# Altium PCB nrf24l01_cell(P40).PcbDoc (part 6 of 11)
Units mm, origin at the board's own origin, x right, y up, seen from the top; angles counter-clockwise.
Board outline 136.2 x 112.2 mm, 2 copper layers (TopLayer, BottomLayer); 520 components, 0 nets, 2804 pads, 1040 vias.
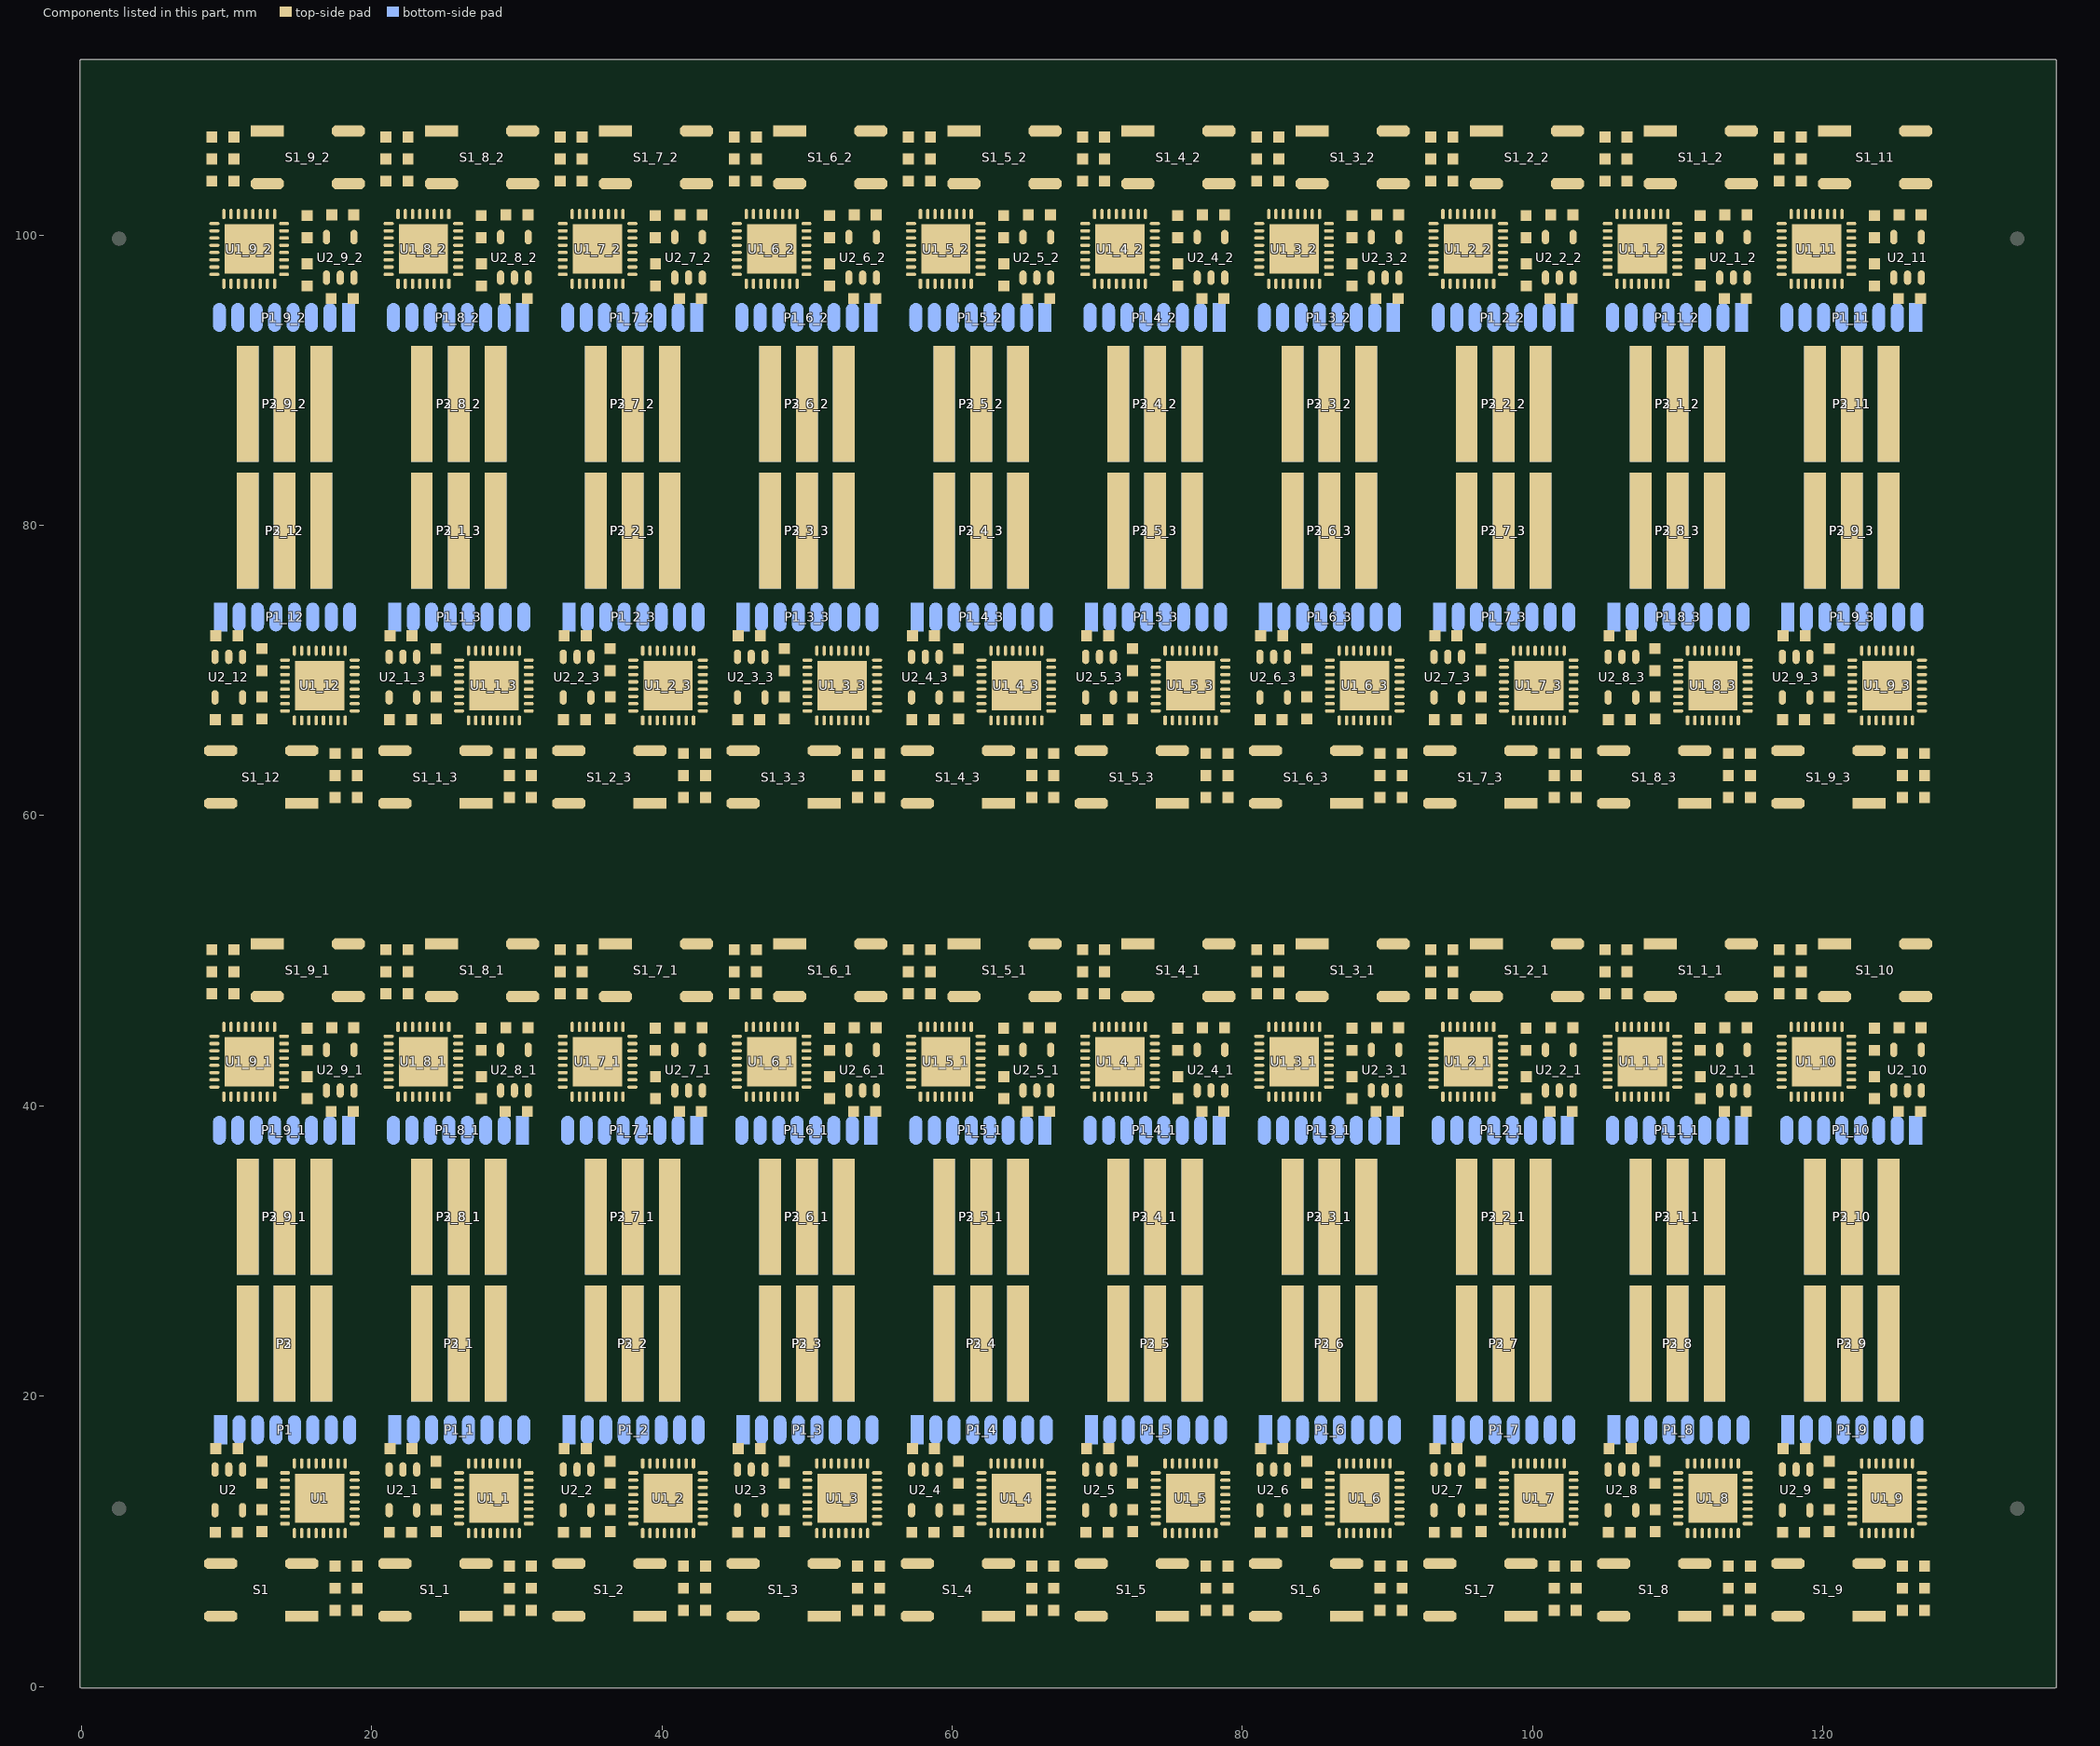
[diagram p6: the components of this part, seen from the top]

## Via types
v1: diameter 0.4, hole 0.2, TopLayer to BottomLayer, tented both sides, 1040 vias

## Nets (pads, with @x,y where several pads share a name; then routed paths per layer and width w, separated by ;. In a path a pad name is that pad's centre, name@x,y a point inside that pad or via, vN(x,y) a via of type N, cw(c..) or ccw(c..) an arc to the next point about the centre after c; other vN are vias at no path point) (continued)
copper on no net: (continued)
  TopLayer w0.203: 108.256,12.381 ccw(c107.81,12.84) 108.45,12.84 ; 108.256,68.381 ccw(c107.81,68.84) 108.45,68.84 ; 108.44,15.41 109.2,16.17 110.786,16.17 111.18,15.776 111.18,15.36 ; 108.44,15.789 ccw(c108.44,16.705) 109.088,16.058 ; 108.44,71.41 109.2,72.17 110.786,72.17 111.18,71.776 111.18,71.36 ; 108.44,71.789 ccw(c108.44,72.705) 109.088,72.058 ; 108.45,12.18 108.45,12.84 ; 108.45,68.18 108.45,68.84 ; 108.644,12.381 cw(c109.09,12.84) 108.45,12.84 ; 108.644,68.381 cw(c109.09,68.84) 108.45,68.84 ; 108.719,15.51 cw(c109.152,15.51) 108.846,15.816 ; 108.719,71.51 cw(c109.152,71.51) 108.846,71.816 ; v1(108.79,19.37) 108.835,19.325 111.04,19.325 111.512,18.854 112.48,18.854 114.83,16.503 114.83,14.71 ; v1(108.79,75.37) 108.835,75.325 111.04,75.325 111.512,74.854 112.48,74.854 114.83,72.503 114.83,70.71 ; 108.82,40.64 108.82,40.224 109.214,39.83 110.8,39.83 111.56,40.59 ; 108.82,96.64 108.82,96.224 109.214,95.83 110.8,95.83 111.56,96.59 ; 108.833,40.405 ccw(c109.302,40.405) 108.971,40.073 ; 108.833,96.405 ccw(c109.302,96.405) 108.971,96.073 ; v1@108.86,19.44 ccw(c109.136,19.716) 109.136,19.325 ; v1@108.86,75.44 ccw(c109.136,75.716) 109.136,75.325 ; v1@109.18,14.01 ccw(c109.012,14.178) 109.25,14.178 ccw(c109.488,14.178) v1@109.32,14.01 ; v1@109.18,70.01 ccw(c109.012,70.178) 109.25,70.178 ccw(c109.488,70.178) v1@109.32,70.01 ; v1@109.195,12.564 cw(c109.545,12.219) 109.545,12.71 ; v1@109.195,68.564 cw(c109.545,68.219) 109.545,68.71 ; v1@109.2,12.42 cw(c109.057,12.277) 109.26,12.277 ; v1@109.2,68.42 cw(c109.057,68.277) 109.26,68.277 ; v1@109.24,38.41 ccw(c109.072,38.242) 109.072,38.48 ccw(c109.072,38.718) v1@109.24,38.55 ; v1@109.24,94.41 ccw(c109.072,94.242) 109.072,94.48 ccw(c109.072,94.718) v1@109.24,94.55 ; v1(109.25,13.94) 109.25,14.55 109.41,14.71 110.03,14.71 ; v1(109.25,69.94) 109.25,70.55 109.41,70.71 110.03,70.71 ; 109.26,12.228 cw(c109.532,12.228) v1@109.34,12.42 ; v1@109.26,12.49 109.26,11.59 109.11,11.44 107.11,11.44 ; v1@109.26,12.53 109.44,12.71 110.03,12.71 ccw(c110.03,11.742) v1@109.34,12.421 ; 109.26,68.228 cw(c109.532,68.228) v1@109.34,68.42 ; v1@109.26,68.49 109.26,67.59 109.11,67.44 107.11,67.44 ; v1@109.26,68.53 109.44,68.71 110.03,68.71 ccw(c110.03,67.742) v1@109.34,68.421 ; v1@109.366,12.512 cw(c109.545,12.555) 109.415,12.685 ; v1@109.366,68.512 cw(c109.545,68.555) 109.415,68.685 ; v1(109.43,17.94) 109.92,17.94 110.005,18.025 112.159,18.025 113.68,16.504 113.68,15.36 ; v1(109.43,73.94) 109.92,73.94 110.005,74.025 112.159,74.025 113.68,72.504 113.68,71.36 ; v1@109.5,17.87 cw(c109.668,17.702) 109.668,17.94 cw(c109.668,18.178) v1@109.5,18.01 ; v1@109.5,73.87 cw(c109.668,73.702) 109.668,73.94 cw(c109.668,74.178) v1@109.5,74.01 ; v1@109.9,45.21 cw(c109.732,45.042) 109.97,45.042 cw(c110.208,45.042) v1@110.04,45.21 ; v1@109.9,101.21 cw(c109.732,101.042) 109.97,101.042 cw(c110.208,101.042) v1@110.04,101.21 ; v1@109.96,10.79 ccw(c109.792,10.958) 110.03,10.958 ccw(c110.268,10.958) v1@110.1,10.79 ; v1@109.96,66.79 ccw(c109.792,66.958) 110.03,66.958 ccw(c110.268,66.958) v1@110.1,66.79 ; 109.97,41.29 110.59,41.29 110.75,41.45 v1(110.75,42.06) ; 109.97,42.79 111.18,42.79 111.55,43.16 ; 109.97,44.79 v1(109.97,45.28) ; 109.97,97.29 110.59,97.29 110.75,97.45 v1(110.75,98.06) ; 109.97,98.79 111.18,98.79 111.55,99.16 ; 109.97,100.79 v1(109.97,101.28) ; 110,23.63 110,20.94 111.68,19.26 112.648,19.26 115.52,16.388 115.52,14.42 115.31,14.21 114.83,14.21 ; 110,79.63 110,76.94 111.68,75.26 112.648,75.26 115.52,72.388 115.52,70.42 115.31,70.21 114.83,70.21 ; v1(110.03,10.72) 110.03,11.21 ; 110.03,13.21 108.82,13.21 108.45,12.84 ; v1(110.03,66.72) 110.03,67.21 ; 110.03,69.21 108.82,69.21 108.45,68.84 ; 110.455,43.29 ccw(c110.455,43.781) v1@110.805,43.436 ; 110.455,99.29 ccw(c110.455,99.781) v1@110.805,99.436 ; v1@110.5,37.99 ccw(c110.332,37.822) 110.332,38.06 ccw(c110.332,38.298) v1@110.5,38.13 ; v1@110.5,93.99 ccw(c110.332,93.822) 110.332,94.06 ccw(c110.332,94.298) v1@110.5,94.13 ; 110.585,43.315 ccw(c110.455,43.445) v1@110.634,43.488 ; 110.585,99.315 ccw(c110.455,99.445) v1@110.634,99.488 ; v1@110.66,99.579 cw(c109.97,100.258) 109.97,99.29 110.56,99.29 v1@110.74,99.47 ; v1@110.66,99.58 ccw(c110.468,99.772) 110.74,99.772 ; v1@110.68,41.99 cw(c110.512,41.822) 110.75,41.822 cw(c110.988,41.822) v1@110.82,41.99 ; v1@110.68,97.99 cw(c110.512,97.822) 110.75,97.822 cw(c110.988,97.822) v1@110.82,97.99 ; v1(110.69,17.52) 111.16,17.52 111.665,17.015 112.68,16 112.68,15.36 ; v1(110.69,73.52) 111.16,73.52 111.665,73.015 112.68,72 112.68,71.36 ; v1@110.74,43.47 110.56,43.29 109.97,43.29 ccw(c109.97,44.258) 110.66,43.579 ccw(c110.468,43.772) 110.74,43.772 ; v1@110.74,43.51 110.74,44.41 110.89,44.56 112.89,44.56 ; 110.74,43.723 ccw(c110.943,43.723) v1@110.8,43.58 ; v1@110.74,99.51 110.74,100.41 110.89,100.56 112.89,100.56 ; 110.74,99.723 ccw(c110.943,99.723) v1@110.8,99.58 ; v1@110.76,17.45 cw(c110.928,17.282) 110.928,17.52 cw(c110.928,17.758) v1@110.76,17.59 ; v1@110.76,73.45 cw(c110.928,73.282) 110.928,73.52 cw(c110.928,73.758) v1@110.76,73.59 ; 110.864,36.675 cw(c110.864,36.284) v1@111.14,36.56 ; 110.864,92.675 cw(c110.864,92.284) v1@111.14,92.56 ; 110.912,39.942 cw(c111.56,39.295) 111.56,40.211 ; 110.912,95.942 cw(c111.56,95.295) 111.56,96.211 ; 111.029,15.927 cw(c110.698,15.595) 111.167,15.595 ; 111.029,71.927 cw(c110.698,71.595) 111.167,71.595 ; 111.154,40.184 ccw(c110.847,40.49) 111.281,40.49 ; 111.154,96.184 ccw(c110.847,96.49) 111.281,96.49 ; 111.356,43.619 cw(c110.91,43.16) 111.55,43.16 ; 111.356,99.619 cw(c110.91,99.16) 111.55,99.16 ; 111.379,8.28 113.486,8.28 ; 111.379,64.28 113.486,64.28 ; 111.55,43.82 111.55,43.16 ; 111.55,99.82 111.55,99.16 ; 111.744,43.619 ccw(c112.19,43.16) 111.55,43.16 ; 111.744,99.619 ccw(c112.19,99.16) 111.55,99.16 ; v1@111.81,37.29 ccw(c111.642,37.122) 111.642,37.36 ccw(c111.642,37.598) v1@111.81,37.43 ; v1@111.81,93.29 ccw(c111.642,93.122) 111.642,93.36 ccw(c111.642,93.598) v1@111.81,93.43 ; v1(111.88,37.36) v1@111.81,37.36 ; v1(111.88,93.36) v1@111.81,93.36 ; v1@111.89,37.28 v1@111.81,37.36 ; v1@111.89,93.28 v1@111.81,93.36 ; v1@111.95,17.422 cw(c111.95,17.184) 112.118,17.352 cw(c112.286,17.52) v1@112.048,17.52 ; v1(111.95,17.52) 113.18,16.29 113.18,15.36 ; v1@111.95,73.422 cw(c111.95,73.184) 112.118,73.352 cw(c112.286,73.52) v1@112.048,73.52 ; v1(111.95,73.52) 113.18,72.29 113.18,71.36 ; 112.006,8.523 ccw(c112.593,9.111) 112.593,8.28 ; 112.006,64.523 ccw(c112.593,65.111) 112.593,64.28 ; 112.15,8.667 ccw(c113.084,9.602) 113.084,8.28 ; 112.15,64.667 ccw(c113.084,65.602) 113.084,64.28 ; 112.54,19.732 cw(c112.54,18.673) 113.288,19.422 ; 112.54,20.17 114.79,17.92 v1(115.45,17.92) ; 112.54,35.3 v1(115.31,38.07) ; 112.54,35.862 ccw(c112.54,37.219) 113.499,36.259 ; 112.54,36.065 ccw(c112.54,37.913) 113.846,36.606 ; 112.54,36.268 ccw(c112.54,38.606) 114.193,36.953 ; v1(112.54,36.86) 113.344,36.86 113.422,36.938 114.734,38.25 114.734,39.62 114.734,41.004 114.79,41.06 114.79,41.84 114.6,42.03 113.06,42.03 112.89,41.86 112.89,41.06 ; 112.54,75.732 cw(c112.54,74.673) 113.288,75.422 ; 112.54,76.17 114.79,73.92 v1(115.45,73.92) ; 112.54,91.3 v1(115.31,94.07) ; 112.54,91.862 ccw(c112.54,93.219) 113.499,92.259 ; 112.54,92.065 ccw(c112.54,93.913) 113.846,92.606 ; 112.54,92.268 ccw(c112.54,94.606) 114.193,92.953 ; v1(112.54,92.86) 113.344,92.86 113.422,92.938 114.734,94.25 114.734,95.62 114.734,97.004 114.79,97.06 114.79,97.84 114.6,98.03 113.06,98.03 112.89,97.86 112.89,97.06 ; v1@112.61,36.79 cw(c112.778,36.622) 112.778,36.86 cw(c112.778,37.098) v1@112.61,36.93 ; v1@112.61,92.79 cw(c112.778,92.622) 112.778,92.86 cw(c112.778,93.098) v1@112.61,92.93 ; 112.782,20.38 ccw(c113.873,20.38) 113.102,19.608 ; 112.782,76.38 ccw(c113.873,76.38) 113.102,75.608 ; 112.785,41.415 ccw(c112.532,41.668) 112.89,41.668 ccw(c113.248,41.668) 112.995,41.415 ; 112.785,44.215 ccw(c112.532,44.468) 112.89,44.468 ccw(c113.248,44.468) 112.995,44.215 ; 112.785,97.415 ccw(c112.532,97.668) 112.89,97.668 ccw(c113.248,97.668) 112.995,97.415 ; 112.785,100.215 ccw(c112.532,100.468) 112.89,100.468 ccw(c113.248,100.468) 112.995,100.215 ; 112.89,43.86 112.89,44.56 ; 112.89,44.484 cw(c113.557,44.484) 113.341,45.116 ; 112.89,44.769 cw(c113.46,44.769) 113.275,45.308 ; 112.89,45.054 cw(c113.362,45.054) 113.209,45.5 ; 112.89,99.86 112.89,100.56 ; 112.89,100.484 cw(c113.557,100.484) 113.341,101.116 ; 112.89,100.769 cw(c113.46,100.769) 113.275,101.308 ; 112.89,101.054 cw(c113.362,101.054) 113.209,101.5 ; 112.985,20.38 ccw(c114.567,20.38) 113.448,19.262 ; 112.985,76.38 ccw(c114.567,76.38) 113.448,75.262 ; v1@113.042,37.37 ccw(c112.804,37.37) 112.972,37.538 ccw(c113.14,37.706) v1@113.14,37.468 ; v1@113.042,93.37 ccw(c112.804,93.37) 112.972,93.538 ccw(c113.14,93.706) v1@113.14,93.468 ; 113.188,20.38 ccw(c115.261,20.38) 113.795,18.915 ; 113.188,35.62 cw(c113.981,35.62) 113.421,36.181 ; 113.188,76.38 ccw(c115.261,76.38) 113.795,74.915 ; 113.188,91.62 cw(c113.981,91.62) 113.421,92.181 ; 113.25,45.38 112.89,45.02 112.89,44.56 ; 113.25,101.38 112.89,101.02 112.89,100.56 ; 113.288,8.082 ccw(c112.811,7.605) 112.811,8.28 ccw(c112.811,8.955) 113.288,8.478 ; 113.288,64.082 ccw(c112.811,63.605) 112.811,64.28 ccw(c112.811,64.955) 113.288,64.478 ; 113.49,6.76 114.21,7.48 114.21,9.16 113.68,9.69 113.68,10.56 ; 113.49,7.039 ccw(c113.49,7.714) 113.967,7.237 ccw(c114.444,6.76) 113.769,6.76 ; 113.49,62.76 114.21,63.48 114.21,65.16 113.68,65.69 113.68,66.56 ; 113.49,63.039 ccw(c113.49,63.714) 113.967,63.237 ccw(c114.444,62.76) 113.769,62.76 ; 114.18,15.36 114.18,16.579 112.311,18.447 108.91,18.447 108.717,18.64 v1@108.19,18.64 ; 114.18,71.36 114.18,72.579 112.311,74.447 108.91,74.447 108.717,74.64 v1@108.19,74.64 ; 114.536,39.422 cw(c114.059,38.945) 114.734,38.945 cw(c115.409,38.945) 114.932,39.422 ; 114.536,39.818 ccw(c114.059,40.295) 114.734,40.295 ccw(c115.409,40.295) 114.932,39.818 ; 114.536,95.422 cw(c114.059,94.945) 114.734,94.945 cw(c115.409,94.945) 114.932,95.422 ; 114.536,95.818 ccw(c114.059,96.295) 114.734,96.295 ccw(c115.409,96.295) 114.932,95.818 ; 114.685,41.415 ccw(c114.432,41.668) 114.79,41.668 ccw(c115.148,41.668) 114.895,41.415 ; 114.685,97.415 ccw(c114.432,97.668) 114.79,97.668 ccw(c115.148,97.668) 114.895,97.415 ; 114.734,40.317 cw(c115.283,40.317) 114.895,40.705 ; 114.734,96.317 cw(c115.283,96.317) 114.895,96.705 ; 114.812,8.478 ccw(c114.335,8.955) 115.01,8.955 ccw(c115.685,8.955) 115.208,8.478 ; 114.812,64.478 ccw(c114.335,64.955) 115.01,64.955 ccw(c115.685,64.955) 115.208,64.478 ; 114.83,11.21 114.83,10.52 115.01,10.34 115.01,8.28 ; 114.83,12.21 v1(115.45,12.21) v1@115.52,12.21 ; 114.83,67.21 114.83,66.52 115.01,66.34 115.01,64.28 ; 114.83,68.21 v1(115.45,68.21) v1@115.52,68.21 ; v1@114.92,9.72 cw(c114.704,9.504) 115.01,9.504 ; v1@114.92,9.86 ccw(c114.704,10.076) 115.01,10.076 ; v1@114.92,65.72 cw(c114.704,65.504) 115.01,65.504 ; v1@114.92,65.86 ccw(c114.704,66.076) 115.01,66.076 ; v1@115.212,38.07 cw(c114.974,38.07) 115.142,37.902 cw(c115.31,37.734) v1@115.31,37.972 ; v1@115.212,94.07 cw(c114.974,94.07) 115.142,93.902 cw(c115.31,93.734) v1@115.31,93.972 ; v1@115.38,12.14 ccw(c115.212,11.972) 115.212,12.21 ccw(c115.212,12.448) v1@115.38,12.28 ; v1@115.38,17.85 ccw(c115.212,17.682) 115.212,17.92 ccw(c115.212,18.158) v1@115.38,17.99 ; v1@115.38,68.14 ccw(c115.212,67.972) 115.212,68.21 ccw(c115.212,68.448) v1@115.38,68.28 ; v1@115.38,73.85 ccw(c115.212,73.682) 115.212,73.92 ccw(c115.212,74.158) v1@115.38,73.99 ; v1@116.48,43.79 v1(116.55,43.79) 117.17,43.79 ; v1@116.48,99.79 v1(116.55,99.79) 117.17,99.79 ; v1(116.55,38.08) 117.21,38.08 119.46,35.83 ; v1(116.55,94.08) 117.21,94.08 119.46,91.83 ; v1@116.62,38.01 cw(c116.788,37.842) 116.788,38.08 cw(c116.788,38.318) v1@116.62,38.15 ; v1@116.62,43.72 cw(c116.788,43.552) 116.788,43.79 cw(c116.788,44.028) v1@116.62,43.86 ; v1@116.62,94.01 cw(c116.788,93.842) 116.788,94.08 cw(c116.788,94.318) v1@116.62,94.15 ; v1@116.62,99.72 cw(c116.788,99.552) 116.788,99.79 cw(c116.788,100.028) v1@116.62,99.86 ; v1(116.69,17.93) 119.46,20.7 ; v1@116.69,18.028 ccw(c116.69,18.266) 116.858,18.098 ccw(c117.026,17.93) v1@116.788,17.93 ; v1(116.69,73.93) 119.46,76.7 ; v1@116.69,74.028 ccw(c116.69,74.266) 116.858,74.098 ccw(c117.026,73.93) v1@116.788,73.93 ; 116.792,47.522 cw(c116.315,47.045) 116.99,47.045 cw(c117.665,47.045) 117.188,47.522 ; 116.792,103.522 cw(c116.315,103.045) 116.99,103.045 cw(c117.665,103.045) 117.188,103.522 ; 116.99,45.924 cw(c117.296,45.924) v1@117.08,46.14 ; 116.99,46.496 ccw(c117.296,46.496) v1@117.08,46.28 ; 116.99,47.72 116.99,45.66 117.17,45.48 117.17,44.79 ; 116.99,101.924 cw(c117.296,101.924) v1@117.08,102.14 ; 116.99,102.496 ccw(c117.296,102.496) v1@117.08,102.28 ; 116.99,103.72 116.99,101.66 117.17,101.48 117.17,100.79 ; 117.068,16.182 cw(c116.591,15.705) 117.266,15.705 cw(c117.941,15.705) 117.464,16.182 ; 117.068,16.578 ccw(c116.591,17.055) 117.266,17.055 ccw(c117.941,17.055) 117.464,16.578 ; 117.068,72.182 cw(c116.591,71.705) 117.266,71.705 cw(c117.941,71.705) 117.464,72.182 ; 117.068,72.578 ccw(c116.591,73.055) 117.266,73.055 ccw(c117.941,73.055) 117.464,72.578 ; 117.105,14.585 cw(c116.852,14.332) 117.21,14.332 cw(c117.568,14.332) 117.315,14.585 ; 117.105,15.295 ccw(c116.717,15.683) 117.266,15.683 ; 117.105,70.585 cw(c116.852,70.332) 117.21,70.332 cw(c117.568,70.332) 117.315,70.585 ; 117.105,71.295 ccw(c116.717,71.683) 117.266,71.683 ; 117.17,41.29 117.17,39.497 119.52,37.146 120.488,37.146 120.96,36.675 123.165,36.675 v1(123.21,36.63) ; 117.17,41.79 116.69,41.79 116.48,41.58 116.48,39.612 119.352,36.74 120.32,36.74 122,35.06 122,32.37 ; 117.17,97.29 117.17,95.497 119.52,93.146 120.488,93.146 120.96,92.675 123.165,92.675 v1(123.21,92.63) ; 117.17,97.79 116.69,97.79 116.48,97.58 116.48,95.612 119.352,92.74 120.32,92.74 122,91.06 122,88.37 ; 117.807,19.047 cw(c119.46,17.394) 119.46,19.732 ; 117.807,75.047 cw(c119.46,73.394) 119.46,75.732 ; 117.82,40.64 117.82,39.421 119.689,37.553 123.09,37.553 123.283,37.36 v1@123.81,37.36 ; 117.82,96.64 117.82,95.421 119.689,93.553 123.09,93.553 123.283,93.36 v1@123.81,93.36 ; 118.154,19.394 cw(c119.46,18.087) 119.46,19.935 ; 118.154,75.394 cw(c119.46,74.087) 119.46,75.935 ; 118.205,37.085 cw(c116.739,35.62) 118.812,35.62 ; 118.205,93.085 cw(c116.739,91.62) 118.812,91.62 ; 118.231,49.24 cw(c117.556,49.24) 118.033,48.763 cw(c118.51,48.286) 118.51,48.961 ; 118.231,105.24 cw(c117.556,105.24) 118.033,104.763 cw(c118.51,104.286) 118.51,104.961 ; 118.32,40.64 118.32,39.496 119.841,37.975 121.995,37.975 122.08,38.06 v1(122.57,38.06) ; 118.32,45.44 118.32,46.31 117.79,46.84 117.79,48.52 118.51,49.24 ; 118.32,96.64 118.32,95.496 119.841,93.975 121.995,93.975 122.08,94.06 v1(122.57,94.06) ; 118.32,101.44 118.32,102.31 117.79,102.84 117.79,104.52 118.51,105.24 ; 118.501,19.741 cw(c119.46,18.781) 119.46,20.138 ; 118.501,75.741 cw(c119.46,74.781) 119.46,76.138 ; 118.514,47.72 120.62,47.72 ; 118.514,103.72 120.62,103.72 ; 118.552,36.738 cw(c117.433,35.62) 119.015,35.62 ; 118.551,92.738 cw(c117.433,91.62) 119.015,91.62 ; 118.579,19.819 ccw(c118.019,20.38) 118.812,20.38 ; 118.579,75.819 ccw(c118.019,76.38) 118.812,76.38 ; 118.659,10.884 ccw(c118.443,11.516) 119.11,11.516 ; 118.659,66.884 ccw(c118.443,67.516) 119.11,67.516 ; 118.712,36.578 ccw(c119.46,37.327) 119.46,36.268 ; 118.712,47.522 cw(c119.189,47.045) 119.189,47.72 cw(c119.189,48.395) 118.712,47.918 ; 118.712,92.578 ccw(c119.46,93.327) 119.46,92.268 ; 118.712,103.522 cw(c119.189,103.045) 119.189,103.72 cw(c119.189,104.395) 118.712,103.918 ; 118.725,10.692 ccw(c118.54,11.231) 119.11,11.231 ; 118.725,66.692 ccw(c118.54,67.231) 119.11,67.231 ; 118.75,10.62 119.11,10.98 119.11,11.44 ; 118.75,66.62 119.11,66.98 119.11,67.44 ; 118.791,10.5 ccw(c118.638,10.946) 119.11,10.946 ; 118.791,66.5 ccw(c118.638,66.946) 119.11,66.946 ; 118.82,40.64 118.82,39.71 v1(120.05,38.48) ; 118.82,96.64 118.82,95.71 v1(120.05,94.48) ; v1@118.86,18.532 cw(c118.86,18.294) 119.028,18.462 cw(c119.196,18.63) v1@118.958,18.63 ; v1(118.86,18.63) 120.07,17.42 122.076,17.42 122.481,17.015 123.09,17.015 124.18,15.925 124.18,15.36 ; v1@118.86,74.532 cw(c118.86,74.294) 119.028,74.462 cw(c119.196,74.63) v1@118.958,74.63 ; v1(118.86,74.63) 120.07,73.42 122.076,73.42 122.481,73.015 123.09,73.015 124.18,71.925 124.18,71.36 ; 118.898,36.392 cw(c118.127,35.62) 119.218,35.62 ; 118.898,92.392 cw(c118.127,91.62) 119.218,91.62 ; 118.916,47.72 cw(c118.916,46.398) 119.85,47.333 ; 118.916,103.72 cw(c118.916,102.398) 119.85,103.333 ; 119.005,11.785 cw(c118.752,11.532) 119.11,11.532 cw(c119.468,11.532) 119.215,11.785 ; 119.005,14.585 cw(c118.752,14.332) 119.11,14.332 cw(c119.468,14.332) 119.215,14.585 ; 119.005,67.785 cw(c118.752,67.532) 119.11,67.532 cw(c119.468,67.532) 119.215,67.785 ; 119.005,70.585 cw(c118.752,70.332) 119.11,70.332 cw(c119.468,70.332) 119.215,70.585 ; 119.11,12.14 119.11,11.44 ; 119.11,14.94 119.11,14.14 118.94,13.97 117.4,13.97 117.21,14.16 117.21,14.94 117.266,14.996 117.266,16.38 117.266,17.75 118.578,19.062 118.656,19.14 v1(119.46,19.14) ; 119.11,68.14 119.11,67.44 ; 119.11,70.94 119.11,70.14 118.94,69.97 117.4,69.97 117.21,70.16 117.21,70.94 117.266,70.996 117.266,72.38 117.266,73.75 118.578,75.062 118.656,75.14 v1(119.46,75.14) ; 119.32,40.64 119.32,40 120.335,38.985 120.84,38.48 v1(121.31,38.48) ; 119.32,96.64 119.32,96 120.335,94.985 120.84,94.48 v1(121.31,94.48) ; v1@119.39,19.07 ccw(c119.222,18.902) 119.222,19.14 ccw(c119.222,19.378) v1@119.39,19.21 ; v1@119.39,75.07 ccw(c119.222,74.902) 119.222,75.14 ccw(c119.222,75.378) v1@119.39,75.21 ; 119.407,47.72 cw(c119.407,46.889) 119.994,47.477 ; 119.407,103.72 cw(c119.407,102.889) 119.994,103.477 ; 119.82,40.64 119.82,40.075 120.91,38.985 121.519,38.985 121.924,38.58 123.93,38.58 v1(125.14,37.37) ; 119.82,96.64 119.82,96.075 120.91,94.985 121.519,94.985 121.924,94.58 123.93,94.58 v1(125.14,93.37) ; v1@119.952,38.48 ccw(c119.714,38.48) 119.882,38.648 ccw(c120.05,38.816) v1@120.05,38.578 ; v1@119.952,94.48 ccw(c119.714,94.48) 119.882,94.648 ccw(c120.05,94.816) v1@120.05,94.578 ; v1@120.11,18.72 v1@120.19,18.64 ; v1@120.11,74.72 v1@120.19,74.64 ; v1(120.12,18.64) v1@120.19,18.64 ; v1(120.12,74.64) v1@120.19,74.64 ; v1@120.19,18.57 cw(c120.358,18.402) 120.358,18.64 cw(c120.358,18.878) v1@120.19,18.71 ; v1@120.19,74.57 cw(c120.358,74.402) 120.358,74.64 cw(c120.358,74.878) v1@120.19,74.71 ; 120.256,12.381 ccw(c119.81,12.84) 120.45,12.84 ; 120.256,68.381 ccw(c119.81,68.84) 120.45,68.84 ; 120.44,15.41 121.2,16.17 122.786,16.17 123.18,15.776 123.18,15.36 ; 120.44,15.789 ccw(c120.44,16.705) 121.088,16.058 ; 120.44,71.41 121.2,72.17 122.786,72.17 123.18,71.776 123.18,71.36 ; 120.44,71.789 ccw(c120.44,72.705) 121.088,72.058 ; 120.45,12.18 120.45,12.84 ; 120.45,68.18 120.45,68.84 ; 120.644,12.381 cw(c121.09,12.84) 120.45,12.84 ; 120.644,68.381 cw(c121.09,68.84) 120.45,68.84 ; 120.719,15.51 cw(c121.152,15.51) 120.846,15.816 ; 120.719,71.51 cw(c121.152,71.51) 120.846,71.816 ; v1(120.79,19.37) 120.835,19.325 123.04,19.325 123.512,18.854 124.48,18.854 126.83,16.503 126.83,14.71 ; v1(120.79,75.37) 120.835,75.325 123.04,75.325 123.512,74.854 124.48,74.854 126.83,72.503 126.83,70.71 ; 120.82,40.64 120.82,40.224 121.214,39.83 122.8,39.83 123.56,40.59 ; 120.82,96.64 120.82,96.224 121.214,95.83 122.8,95.83 123.56,96.59 ; 120.833,40.405 ccw(c121.302,40.405) 120.971,40.073 ; 120.833,96.405 ccw(c121.302,96.405) 120.971,96.073 ; v1@120.86,19.44 ccw(c121.136,19.716) 121.136,19.325 ; v1@120.86,75.44 ccw(c121.136,75.716) 121.136,75.325 ; v1@121.18,14.01 ccw(c121.012,14.178) 121.25,14.178 ccw(c121.488,14.178) v1@121.32,14.01 ; v1@121.18,70.01 ccw(c121.012,70.178) 121.25,70.178 ccw(c121.488,70.178) v1@121.32,70.01 ; v1@121.195,12.564 cw(c121.545,12.219) 121.545,12.71 ; v1@121.195,68.564 cw(c121.545,68.219) 121.545,68.71 ; v1@121.2,12.42 cw(c121.057,12.277) 121.26,12.277 ; v1@121.2,68.42 cw(c121.057,68.277) 121.26,68.277 ; v1@121.24,38.41 ccw(c121.072,38.242) 121.072,38.48 ccw(c121.072,38.718) v1@121.24,38.55 ; v1@121.24,94.41 ccw(c121.072,94.242) 121.072,94.48 ccw(c121.072,94.718) v1@121.24,94.55 ; v1(121.25,13.94) 121.25,14.55 121.41,14.71 122.03,14.71 ; v1(121.25,69.94) 121.25,70.55 121.41,70.71 122.03,70.71 ; 121.26,12.228 cw(c121.532,12.228) v1@121.34,12.42 ; v1@121.26,12.49 121.26,11.59 121.11,11.44 119.11,11.44 ; v1@121.26,12.53 121.44,12.71 122.03,12.71 ccw(c122.03,11.742) v1@121.34,12.421 ; 121.26,68.228 cw(c121.532,68.228) 121.34,68.42 cw(c122.03,67.742) 122.03,68.71 121.44,68.71 v1@121.26,68.53 ; v1@121.26,68.49 121.26,67.59 121.11,67.44 119.11,67.44 ; v1@121.366,12.512 cw(c121.545,12.555) 121.415,12.685 ; v1@121.366,68.512 cw(c121.545,68.555) 121.415,68.685 ; v1(121.43,17.94) 121.92,17.94 122.005,18.025 124.159,18.025 125.68,16.504 125.68,15.36 ; v1(121.43,73.94) 121.92,73.94 122.005,74.025 124.159,74.025 125.68,72.504 125.68,71.36 ; v1@121.5,17.87 cw(c121.668,17.702) 121.668,17.94 cw(c121.668,18.178) v1@121.5,18.01 ; v1@121.5,73.87 cw(c121.668,73.702) 121.668,73.94 cw(c121.668,74.178) v1@121.5,74.01 ; v1@121.9,45.21 cw(c121.732,45.042) 121.97,45.042 cw(c122.208,45.042) v1@122.04,45.21 ; v1@121.9,101.21 cw(c121.732,101.042) 121.97,101.042 cw(c122.208,101.042) v1@122.04,101.21 ; v1@121.96,10.79 ccw(c121.792,10.958) 122.03,10.958 ccw(c122.268,10.958) v1@122.1,10.79 ; v1@121.96,66.79 ccw(c121.792,66.958) 122.03,66.958 ccw(c122.268,66.958) v1@122.1,66.79 ; 121.97,41.29 122.59,41.29 122.75,41.45 v1(122.75,42.06) ; 121.97,42.79 123.18,42.79 123.55,43.16 ; 121.97,44.79 v1(121.97,45.28) ; 121.97,97.29 122.59,97.29 122.75,97.45 v1(122.75,98.06) ; 121.97,98.79 123.18,98.79 123.55,99.16 ; 121.97,100.79 v1(121.97,101.28) ; 122,23.63 122,20.94 123.68,19.26 124.648,19.26 127.52,16.388 127.52,14.42 127.31,14.21 126.83,14.21 ; 122,79.63 122,76.94 123.68,75.26 124.648,75.26 127.52,72.388 127.52,70.42 127.31,70.21 126.83,70.21 ; v1(122.03,10.72) 122.03,11.21 ; 122.03,13.21 120.82,13.21 120.45,12.84 ; v1(122.03,66.72) 122.03,67.21 ; 122.03,69.21 120.82,69.21 120.45,68.84 ; 122.455,43.29 ccw(c122.455,43.781) v1@122.805,43.436 ; 122.455,99.29 ccw(c122.455,99.781) v1@122.805,99.436 ; v1@122.5,37.99 ccw(c122.332,37.822) 122.332,38.06 ccw(c122.332,38.298) v1@122.5,38.13 ; v1@122.5,93.99 ccw(c122.332,93.822) 122.332,94.06 ccw(c122.332,94.298) v1@122.5,94.13 ; 122.585,43.315 ccw(c122.455,43.445) v1@122.634,43.488 ; 122.585,99.315 ccw(c122.455,99.445) v1@122.634,99.488 ; v1@122.66,99.579 cw(c121.97,100.258) 121.97,99.29 122.56,99.29 v1@122.74,99.47 ; v1@122.66,99.58 ccw(c122.468,99.772) 122.74,99.772 ; v1@122.68,41.99 cw(c122.512,41.822) 122.75,41.822 cw(c122.988,41.822) v1@122.82,41.99 ; v1@122.68,97.99 cw(c122.512,97.822) 122.75,97.822 cw(c122.988,97.822) v1@122.82,97.99 ; v1(122.69,17.52) 123.16,17.52 123.665,17.015 124.68,16 124.68,15.36 ; v1(122.69,73.52) 123.16,73.52 123.665,73.015 124.68,72 124.68,71.36 ; v1@122.74,43.47 122.56,43.29 121.97,43.29 ccw(c121.97,44.258) 122.66,43.579 ccw(c122.468,43.772) 122.74,43.772 ; v1@122.74,43.51 122.74,44.41 122.89,44.56 124.89,44.56 ; 122.74,43.723 ccw(c122.943,43.723) v1@122.8,43.58 ; v1@122.74,99.51 122.74,100.41 122.89,100.56 124.89,100.56 ; 122.74,99.723 ccw(c122.943,99.723) v1@122.8,99.58 ; v1@122.76,17.45 cw(c122.928,17.282) 122.928,17.52 cw(c122.928,17.758) v1@122.76,17.59 ; v1@122.76,73.45 cw(c122.928,73.282) 122.928,73.52 cw(c122.928,73.758) v1@122.76,73.59 ; 122.864,36.675 cw(c122.864,36.284) v1@123.14,36.56 ; 122.864,92.675 cw(c122.864,92.284) v1@123.14,92.56 ; 122.912,39.942 cw(c123.56,39.295) 123.56,40.211 ; 122.912,95.942 cw(c123.56,95.295) 123.56,96.211 ; 123.029,15.927 cw(c122.698,15.595) 123.167,15.595 ; 123.029,71.927 cw(c122.698,71.595) 123.167,71.595 ; 123.154,40.184 ccw(c122.847,40.49) 123.281,40.49 ; 123.154,96.184 ccw(c122.847,96.49) 123.281,96.49 ; 123.356,43.619 cw(c122.91,43.16) 123.55,43.16 ; 123.356,99.619 cw(c122.91,99.16) 123.55,99.16 ; 123.379,8.28 125.486,8.28 ; 123.379,64.28 125.486,64.28 ; 123.55,43.82 123.55,43.16 ; 123.55,99.82 123.55,99.16 ; 123.744,43.619 ccw(c124.19,43.16) 123.55,43.16 ; 123.744,99.619 ccw(c124.19,99.16) 123.55,99.16 ; v1@123.81,37.29 ccw(c123.642,37.122) 123.642,37.36 ccw(c123.642,37.598) v1@123.81,37.43 ; v1@123.81,93.29 ccw(c123.642,93.122) 123.642,93.36 ccw(c123.642,93.598) v1@123.81,93.43 ; v1(123.88,37.36) v1@123.81,37.36 ; v1(123.88,93.36) v1@123.81,93.36 ; v1@123.89,37.28 v1@123.81,37.36 ; v1@123.89,93.28 v1@123.81,93.36 ; v1@123.95,17.422 cw(c123.95,17.184) 124.118,17.352 cw(c124.286,17.52) v1@124.048,17.52 ; v1(123.95,17.52) 125.18,16.29 125.18,15.36 ; v1@123.95,73.422 cw(c123.95,73.184) 124.118,73.352 cw(c124.286,73.52) v1@124.048,73.52 ; v1(123.95,73.52) 125.18,72.29 125.18,71.36 ; 124.006,8.523 ccw(c124.593,9.111) 124.593,8.28 ; 124.006,64.523 ccw(c124.593,65.111) 124.593,64.28 ; 124.15,8.667 ccw(c125.084,9.602) 125.084,8.28 ; 124.15,64.667 ccw(c125.084,65.602) 125.084,64.28 ; 124.54,19.732 cw(c124.54,18.673) 125.288,19.422 ; 124.54,20.17 126.79,17.92 v1(127.45,17.92) ; 124.54,35.3 v1(127.31,38.07) ; 124.54,35.862 ccw(c124.54,37.219) 125.499,36.259 ; 124.54,36.065 ccw(c124.54,37.913) 125.846,36.606 ; 124.54,36.268 ccw(c124.54,38.606) 126.193,36.953 ; v1(124.54,36.86) 125.344,36.86 125.422,36.938 126.734,38.25 126.734,39.62 126.734,41.004 126.79,41.06 126.79,41.84 126.6,42.03 125.06,42.03 124.89,41.86 124.89,41.06 ; 124.54,75.732 cw(c124.54,74.673) 125.288,75.422 ; 124.54,76.17 126.79,73.92 v1(127.45,73.92) ; 124.54,91.3 v1(127.31,94.07) ; 124.54,91.862 ccw(c124.54,93.219) 125.499,92.259 ; 124.54,92.065 ccw(c124.54,93.913) 125.846,92.606 ; 124.54,92.268 ccw(c124.54,94.606) 126.193,92.953 ; v1(124.54,92.86) 125.344,92.86 125.422,92.938 126.734,94.25 126.734,95.62 126.734,97.004 126.79,97.06 126.79,97.84 126.6,98.03 125.06,98.03 124.89,97.86 124.89,97.06 ; v1@124.61,36.79 cw(c124.778,36.622) 124.778,36.86 cw(c124.778,37.098) v1@124.61,36.93 ; v1@124.61,92.79 cw(c124.778,92.622) 124.778,92.86 cw(c124.778,93.098) v1@124.61,92.93 ; 124.782,20.38 ccw(c125.873,20.38) 125.102,19.608 ; 124.782,76.38 ccw(c125.873,76.38) 125.102,75.608 ; 124.785,41.415 ccw(c124.532,41.668) 124.89,41.668 ccw(c125.248,41.668) 124.995,41.415 ; 124.785,44.215 ccw(c124.532,44.468) 124.89,44.468 ccw(c125.248,44.468) 124.995,44.215 ; 124.785,97.415 ccw(c124.532,97.668) 124.89,97.668 ccw(c125.248,97.668) 124.995,97.415 ; 124.785,100.215 ccw(c124.532,100.468) 124.89,100.468 ccw(c125.248,100.468) 124.995,100.215 ; 124.89,43.86 124.89,44.56 ; 124.89,44.484 cw(c125.557,44.484) 125.341,45.116 ; 124.89,44.769 cw(c125.46,44.769) 125.275,45.308 ; 124.89,45.054 cw(c125.362,45.054) 125.209,45.5 ; 124.89,99.86 124.89,100.56 ; 124.89,100.484 cw(c125.557,100.484) 125.341,101.116 ; 124.89,100.769 cw(c125.46,100.769) 125.275,101.308 ; 124.89,101.054 cw(c125.362,101.054) 125.209,101.5 ; 124.985,20.38 ccw(c126.567,20.38) 125.448,19.262 ; 124.985,76.38 ccw(c126.567,76.38) 125.448,75.262 ; v1@125.042,37.37 ccw(c124.804,37.37) 124.972,37.538 ccw(c125.14,37.706) v1@125.14,37.468 ; v1@125.042,93.37 ccw(c124.804,93.37) 124.972,93.538 ccw(c125.14,93.706) v1@125.14,93.468 ; 125.188,20.38 ccw(c127.261,20.38) 125.795,18.915 ; 125.188,35.62 cw(c125.981,35.62) 125.421,36.181 ; 125.188,76.38 ccw(c127.261,76.38) 125.795,74.915 ; 125.188,91.62 cw(c125.981,91.62) 125.421,92.181 ; 125.25,45.38 124.89,45.02 124.89,44.56 ; 125.25,101.38 124.89,101.02 124.89,100.56 ; 125.288,8.082 ccw(c124.811,7.605) 124.811,8.28 ccw(c124.811,8.955) 125.288,8.478 ; 125.288,64.082 ccw(c124.811,63.605) 124.811,64.28 ccw(c124.811,64.955) 125.288,64.478 ; 125.49,6.76 126.21,7.48 126.21,9.16 125.68,9.69 125.68,10.56 ; 125.49,7.039 ccw(c125.49,7.714) 125.967,7.237 ccw(c126.444,6.76) 125.769,6.76 ; 125.49,62.76 126.21,63.48 126.21,65.16 125.68,65.69 125.68,66.56 ; 125.49,63.039 ccw(c125.49,63.714) 125.967,63.237 ccw(c126.444,62.76) 125.769,62.76 ; 126.18,15.36 126.18,16.579 124.311,18.447 120.91,18.447 120.717,18.64 v1@120.19,18.64 ; 126.18,71.36 126.18,72.579 124.311,74.447 120.91,74.447 120.717,74.64 v1@120.19,74.64 ; 126.536,39.422 cw(c126.059,38.945) 126.734,38.945 cw(c127.409,38.945) 126.932,39.422 ; 126.536,39.818 ccw(c126.059,40.295) 126.734,40.295 ccw(c127.409,40.295) 126.932,39.818 ; 126.536,95.422 cw(c126.059,94.945) 126.734,94.945 cw(c127.409,94.945) 126.932,95.422 ; 126.536,95.818 ccw(c126.059,96.295) 126.734,96.295 ccw(c127.409,96.295) 126.932,95.818 ; 126.685,41.415 ccw(c126.432,41.668) 126.79,41.668 ccw(c127.148,41.668) 126.895,41.415 ; 126.685,97.415 ccw(c126.432,97.668) 126.79,97.668 ccw(c127.148,97.668) 126.895,97.415 ; 126.734,40.317 cw(c127.283,40.317) 126.895,40.705 ; 126.734,96.317 cw(c127.283,96.317) 126.895,96.705 ; 126.812,8.478 ccw(c126.335,8.955) 127.01,8.955 ccw(c127.685,8.955) 127.208,8.478 ; 126.812,64.478 ccw(c126.335,64.955) 127.01,64.955 ccw(c127.685,64.955) 127.208,64.478 ; 126.83,11.21 126.83,10.52 127.01,10.34 127.01,8.28 ; 126.83,12.21 v1(127.45,12.21) v1@127.52,12.21 ; 126.83,67.21 126.83,66.52 127.01,66.34 127.01,64.28 ; 126.83,68.21 v1(127.45,68.21) v1@127.52,68.21 ; v1@126.92,9.72 cw(c126.704,9.504) 127.01,9.504 ; v1@126.92,9.86 ccw(c126.704,10.076) 127.01,10.076 ; v1@126.92,65.72 cw(c126.704,65.504) 127.01,65.504 ; v1@126.92,65.86 ccw(c126.704,66.076) 127.01,66.076 ; v1@127.212,38.07 cw(c126.974,38.07) 127.142,37.902 cw(c127.31,37.734) v1@127.31,37.972 ; v1@127.212,94.07 cw(c126.974,94.07) 127.142,93.902 cw(c127.31,93.734) v1@127.31,93.972 ; v1@127.38,12.14 ccw(c127.212,11.972) 127.212,12.21 ccw(c127.212,12.448) v1@127.38,12.28 ; v1@127.38,17.85 ccw(c127.212,17.682) 127.212,17.92 ccw(c127.212,18.158) v1@127.38,17.99 ; v1@127.38,68.14 ccw(c127.212,67.972) 127.212,68.21 ccw(c127.212,68.448) v1@127.38,68.28 ; v1@127.38,73.85 ccw(c127.212,73.682) 127.212,73.92 ccw(c127.212,74.158) v1@127.38,73.99